# Altium PCB Skeecb.PcbDoc
Units mm, origin at the board's own origin, x right, y up, seen from the top; angles counter-clockwise.
Board outline 102 x 102 mm, 2 copper layers (Top Layer, Bottom Layer); 46 components, 37 nets, 162 pads, 6 vias.
Unrouted connection lines stored in the file: 42.
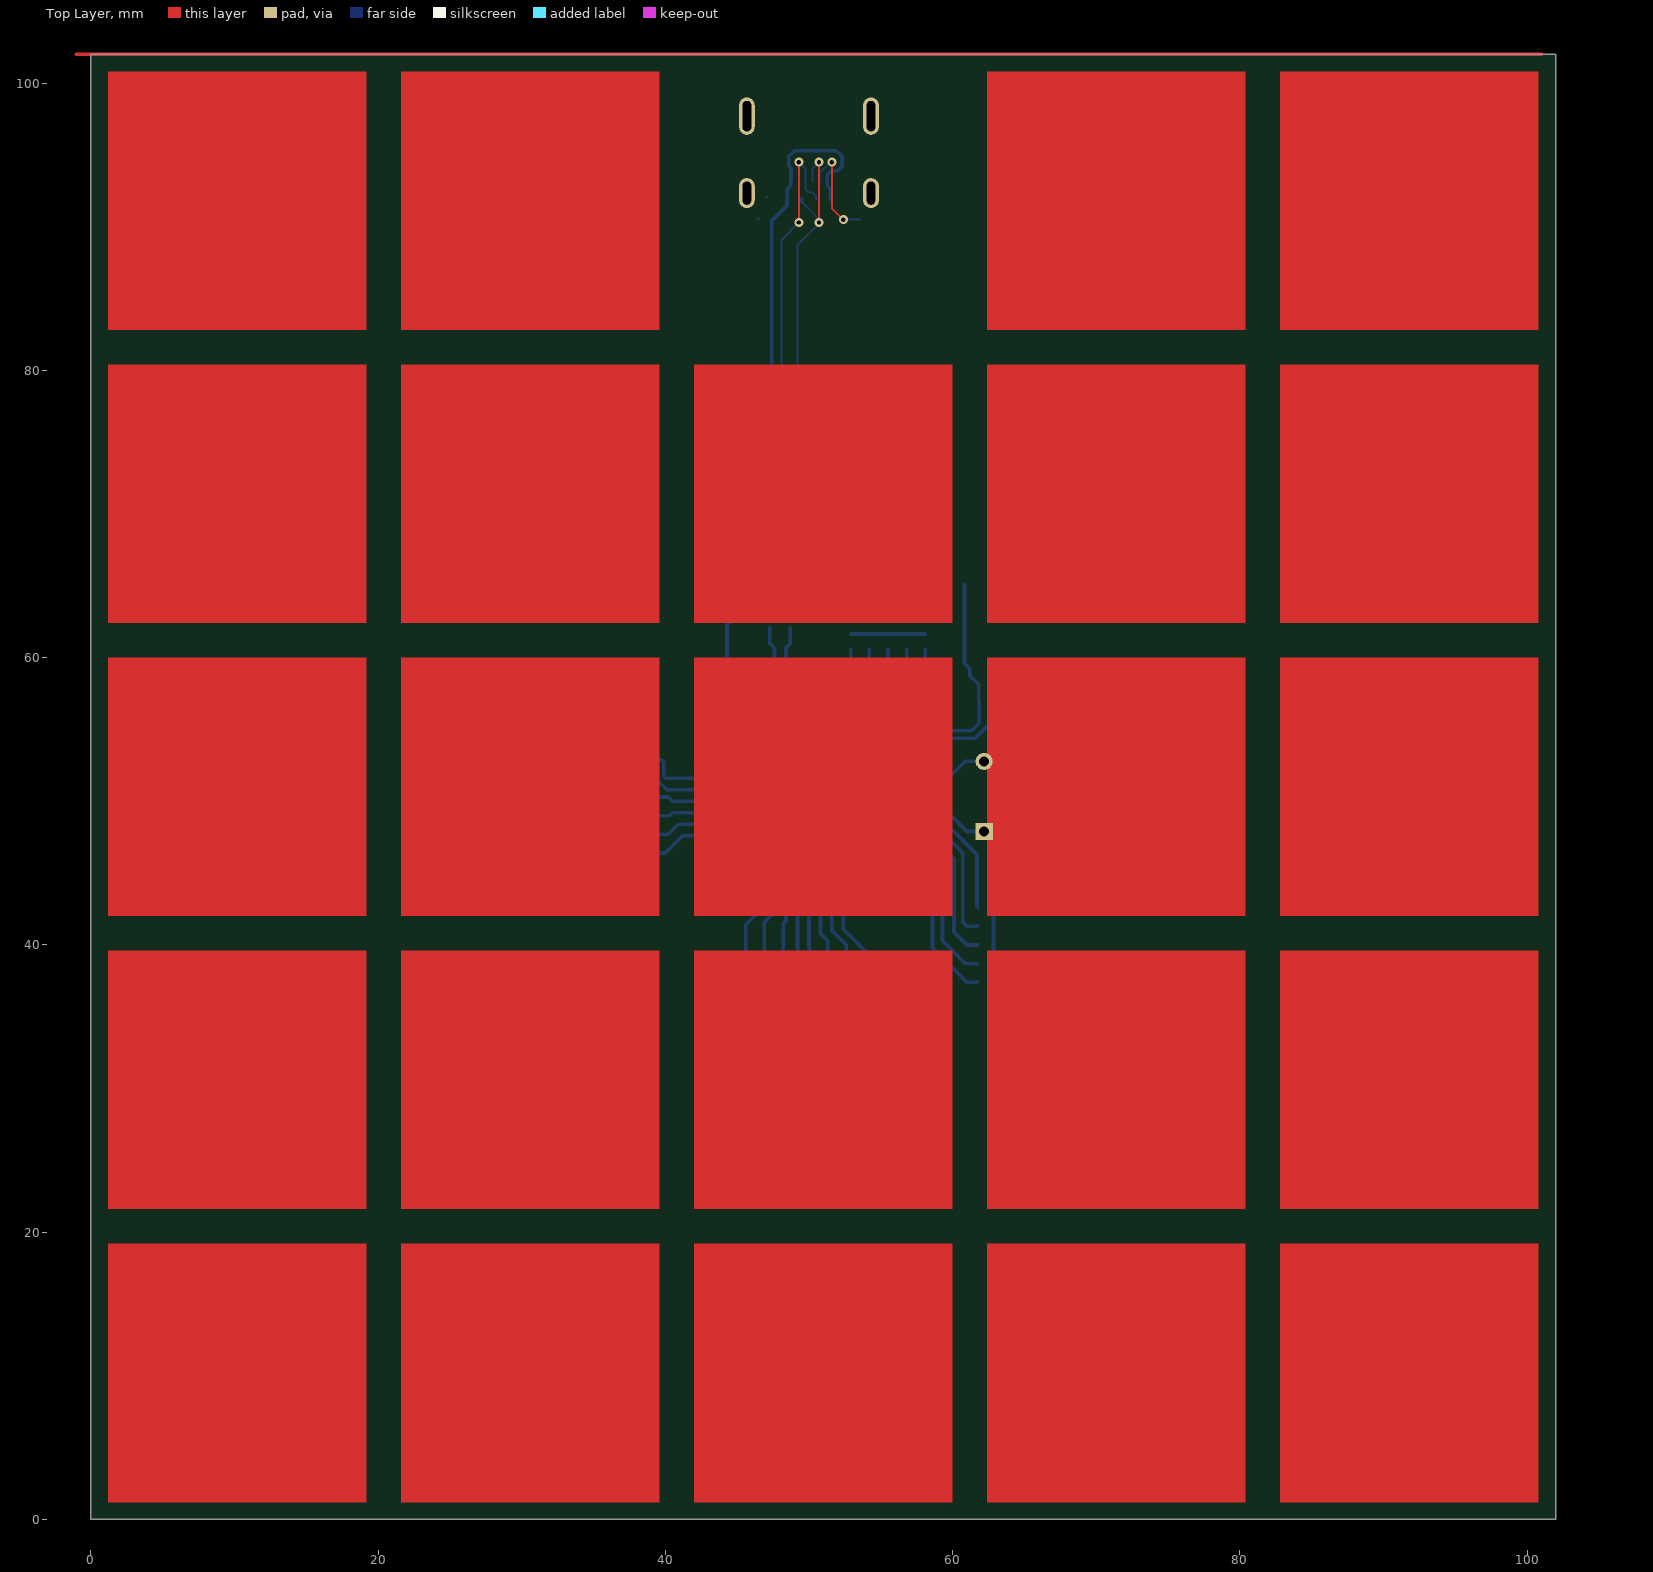
[diagram p0: Top Layer view]
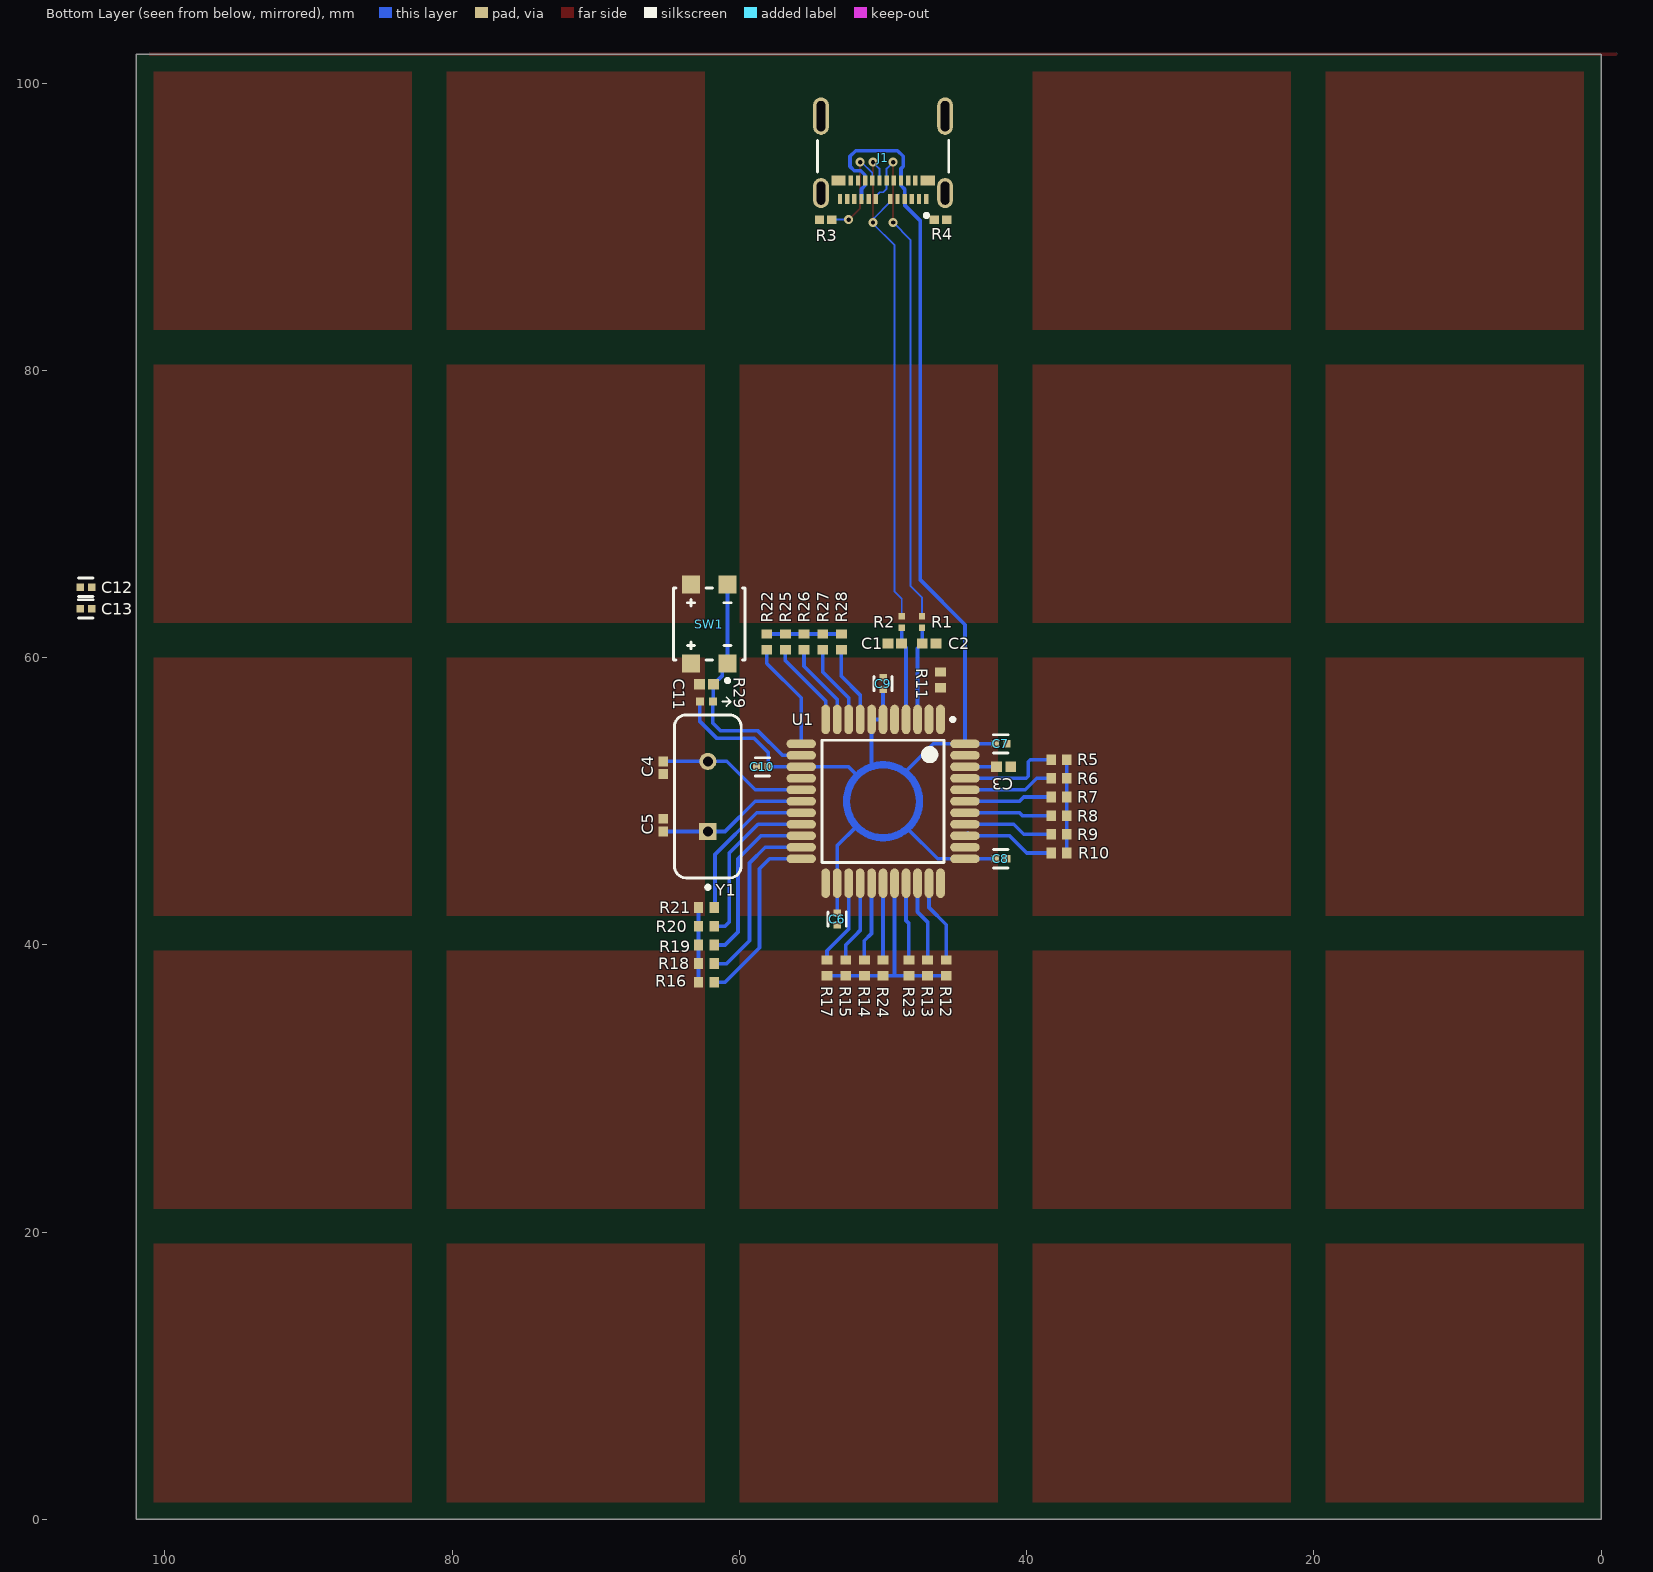
[diagram p1: Bottom Layer view, seen from below]

## Layer stack, top to bottom
Top Solder: solder mask 0.0102, Solder Resist, Dk 3.5
Top Layer: signal copper 0.0356
Dielectric 1: dielectric 0.32, FR-4, Dk 4.8
Bottom Layer: signal copper 0.0356
Bottom Solder: solder mask 0.0102, Solder Resist, Dk 3.5

## Board outline
0,0 0,102 102,102 102,0

## Design rules (kind name [scope] priority, off if disabled: settings)
Clearance [All] p1: gap=0.127 ignorepadtopadclearanceinfootprint=TRUE except(0: Arc-Hole Track-Hole SMDPad-Hole THPad-Hole Via-Hole Fill-Hole Poly-Hole Region-Hole Text-Hole; 0.254: SMDPad-SMDPad)
PolygonConnect [All] p1: connectstyle=Relief reliefconductorwidth=0.254 reliefentries=4 polygonreliefangle="90 Angle" airgapwidth=0.254
RoutingVias [All] p1: holewidth=0.711 width=1.27 viastyle="Through Hole" minholewidth=0.711 minwidth=1.27 maxholewidth=0.711 maxwidth=1.27
SolderMaskExpansion [All] p1: expansion=0.102 istentingtop=FALSE
Width Width_1 [All] p1: maxlimit=1.27 minlimit=0.127 preferedwidth=0.254 minimp=50.000000 maximp=50.000000 favimp=50.000000
30 further rules are at their usual default settings.

## Classes and differential pairs
component class Skematic: C1 C2 C3 C4 C5 C7 C8 C9 C10 C11 C12 C13 J1 R1 R2 R3 R4 R5 R6 R7 R8 R9 R10 R11 R12 R13 R14 R15 R16 R17 R18 R19 R20 R21 R22 R23 R24 R25 R26 R27 R28 R29 U1

## Components (designator, comment, footprint, x,y, rotation, side; value= is the part's Value field where it differs from the comment)
C1 "47pF" CAPC1005X55X30ML05T10 49.19,60.99 r180 bottom
C2 "47pF" CAPC1005X55X30ML05T10 46.79,60.99 r180 bottom
C3 "100nF" CAPC1050X55X23ML05T13 41.6,52.4 r0 bottom
C4 "22pF" CAPC1005X56X25NL10T15 65.3,52.34 r90 bottom
C5 "22pF" CAPC1005X56X25NL10T15 65.3,48.34 r270 bottom
C6 "100nF" FP-C0402-BB-MFG 53.2,41.8 r270 bottom value="0.10 μF"
C7 "100nF" FP-C0402-BB-MFG 41.8,54 r180 bottom value="0.10 μF"
C8 "100nF" FP-C0402-BB-MFG 41.8,46 r180 bottom value="0.10 μF"
C9 "100nF" FP-C0402-BB-MFG 50,58.2 r90 bottom value="0.10 μF"
C10 "100nF" FP-C0402-BB-MFG 58.4,52.4 r0 bottom value="0.10 μF"
C11 "100nF" CAPC1050X55X23ML05T13 62.3,58.14 r0 bottom
C12 "100nF" FP-C0402-BB-MFG 105.5,64.9 r180 bottom value="0.10 μF"
C13 "100nF" FP-C0402-BB-MFG 105.5,63.4 r180 bottom value="0.10 μF"
J1 "1054500101" FP-1054500101-MFG 50,95.7 r0 bottom locked
R1 "22R" RESC1005X40X25LL05T05 47.29,62.49 r90 bottom
R2 "22R" RESC1005X40X25LL05T05 48.69,62.49 r90 bottom
R3 "5.1K" RESC1005X40X25NL10T10 54,90.5 r0 bottom
R4 "5.1K" RESC1005X40X25NL10T10 46,90.5 r180 bottom
R5 "1M" RESC0402(1005)_M 37.75,52.9 r180 bottom value="1000000.00 Ohm"
R6 "1M" RESC0402(1005)_M 37.75,51.6 r180 bottom value="1000000.00 Ohm"
R7 "1M" RESC0402(1005)_M 37.75,50.3 r180 bottom value="1000000.00 Ohm"
R8 "1M" RESC0402(1005)_M 37.75,49 r180 bottom value="1000000.00 Ohm"
R9 "1M" RESC0402(1005)_M 37.75,47.7 r180 bottom value="1000000.00 Ohm"
R10 "1M" RESC0402(1005)_M 37.75,46.4 r180 bottom value="1000000.00 Ohm"
R11 "1M" RESC0402(1005)_M 46,58.45 r90 bottom value="1000000.00 Ohm"
R12 "1M" RESC0402(1005)_M 45.6,38.4 r270 bottom value="1000000.00 Ohm"
R13 "1M" RESC0402(1005)_M 46.9,38.4 r270 bottom value="1000000.00 Ohm"
R14 "1M" RESC0402(1005)_M 51.3,38.4 r270 bottom value="1000000.00 Ohm"
R15 "1M" RESC0402(1005)_M 52.6,38.4 r270 bottom value="1000000.00 Ohm"
R16 "1M" RESC0402(1005)_M 62.3,37.4 r0 bottom value="1000000.00 Ohm"
R17 "1M" RESC0402(1005)_M 53.9,38.4 r270 bottom value="1000000.00 Ohm"
R18 "1M" RESC0402(1005)_M 62.3,38.7 r0 bottom value="1000000.00 Ohm"
R19 "1M" RESC0402(1005)_M 62.3,40 r0 bottom value="1000000.00 Ohm"
R20 "1M" RESC0402(1005)_M 62.3,41.3 r0 bottom value="1000000.00 Ohm"
R21 "1M" RESC0402(1005)_M 62.3,42.6 r0 bottom value="1000000.00 Ohm"
R22 "1M" RESC0402(1005)_M 58.1,61.1 r90 bottom value="1000000.00 Ohm"
R23 "1M" RESC0402(1005)_M 48.2,38.4 r270 bottom value="1000000.00 Ohm"
R24 "1M" RESC0402(1005)_M 50,38.4 r270 bottom value="1000000.00 Ohm"
R25 "1M" RESC0402(1005)_M 56.8,61.1 r90 bottom value="1000000.00 Ohm"
R26 "1M" RESC0402(1005)_M 55.5,61.1 r90 bottom value="1000000.00 Ohm"
R27 "1M" RESC0402(1005)_M 54.2,61.1 r90 bottom value="1000000.00 Ohm"
R28 "1M" RESC0402(1005)_M 52.9,61.1 r90 bottom value="1000000.00 Ohm"
R29 "10K" RESC1005X40X25NL05T05 62.3,56.94 r180 bottom
SW1 "7914G-1-000E" BOUR-7914G-1-000E_V 62.1,62.34 r0 bottom
U1 "ATmega32U4-AU" 44ML_M 50,50 r270 bottom locked
Y1 "16Mhz" FOX-FOXSLF160-20 62.2,50.34 r90 bottom

## Footprints (in the part's own frame and the unit in brackets; to place one, negate y for a bottom-side part, rotate by r counter-clockwise, add the part's x,y. Pads: shape width x height; smd on the part's side, far side on the other; paste and mask are expansions set on the pad)
44ML_M [mm] "Thin QFP, 44-Leads, Body 10x10mm, Pitch 0.8mm, IPC Low Density"
  oval 2.05x0.6 smd: 1(-5.7,4) 2(-5.7,3.2) 3(-5.7,2.4) 4(-5.7,1.6) 5(-5.7,0.8) 6(-5.7,0) 7(-5.7,-0.8) 8(-5.7,-1.6) 9(-5.7,-2.4) 10(-5.7,-3.2) 11(-5.7,-4) 23(5.7,-4) 24(5.7,-3.2) 25(5.7,-2.4) 26(5.7,-1.6) 27(5.7,-0.8) 28(5.7,0) 29(5.7,0.8) 30(5.7,1.6) 31(5.7,2.4) 32(5.7,3.2) 33(5.7,4)
  oval 0.6x2.05 smd: 12(-4,-5.7) 13(-3.2,-5.7) 14(-2.4,-5.7) 15(-1.6,-5.7) 16(-0.8,-5.7) 17(0,-5.7) 18(0.8,-5.7) 19(1.6,-5.7) 20(2.4,-5.7) 21(3.2,-5.7) 22(4,-5.7) 34(4,5.7) 35(3.2,5.7) 36(2.4,5.7) 37(1.6,5.7) 38(0.8,5.7) 39(0,5.7) 40(-0.8,5.7) 41(-1.6,5.7) 42(-2.4,5.7) 43(-3.2,5.7) 44(-4,5.7)
  silkscreen extent -5.82,-4.25 4.25,4.97, body extent -5,-5 5,5, height 1.2
BOUR-7914G-1-000E_V [mm] "SMD, 4-Leads, Body 5x5mm, Height 4.49mm"
  rect 1.27x1.27 smd: 1(-1.27,2.75) 2(1.27,2.75) 3(1.27,-2.75) 4(-1.27,-2.75)
  silkscreen extent -2.5,-2.5 2.5,4.06, body extent -2.5,-3.1 2.5,3.1, height 4.11
CAPC1005X55X30ML05T10 [mm] "Chip Capacitor, 2-Leads, Body 1.00x0.50mm, IPC Low Density"
  rect 0.76x0.72 smd: 1(-0.48,0) 2(0.48,0)
  body extent -0.53,-0.28 0.53,0.27, height 0.55
CAPC1005X56X25NL10T15 [mm] "Chip Capacitor, 2-Leads, Body 1.00x0.50mm, IPC Medium Density"
  rect 0.68x0.64 smd: 1(-0.44,0) 2(0.44,0)
  body extent -0.55,-0.3 0.55,0.3, height 0.56
CAPC1050X55X23ML05T13 [mm] "Chip Capacitor, 2-Leads, Body 1.05x0.55mm, IPC Low Density"
  rect 0.76x0.72 smd: 1(-0.49,0) 2(0.49,0)
  body extent -0.53,-0.28 0.53,0.27, height 0.55
FOX-FOXSLF160-20 [mm] "THD, 2-Leads, Body 11.35x4.65mm"
  rect 1.2x1.2 hole 0.7: 1(-2.44,0)
  round 1.2 hole 0.7: 2(2.44,0)
  silkscreen extent -6.45,-2.32 5.68,2.32, body extent -5.67,-2.32 5.68,2.33, height 3.6
FP-1054500101-MFG [mm]
  rrect100% 1.1x2.1 hole 1.6 slot 0.6 at 0 deg paste-1000 mask+0: 1(-4.32,3.36) 2(4.32,3.36)
  rrect100% 1.1x2.6 hole 2.1 slot 0.6 at 0 deg paste-1000 mask+0: 3(-4.32,-2) 4(4.32,-2)
  rect 0.3x0.7 smd paste+0 mask+0: A1(-3,3.77) A2(-2.5,3.77) A3(-2,3.77) A4(-1.5,3.77) A5(-1,3.77) A6(-0.5,3.77) A7(0.5,3.77) A8(1,3.77) A9(1.5,3.77) A10(2,3.77) A11(2.5,3.77) A12(3,3.77) B2(2.25,2.47) B3(1.75,2.47) B4(1.25,2.47) B5(0.75,2.47) B6(0.25,2.47) B7(-0.25,2.47) B8(-0.75,2.47) B9(-1.25,2.47) B10(-1.75,2.47) B11(-2.25,2.47)
  rect 1x0.7 smd paste+0 mask+0: B1(3.1,2.47) B12(-3.1,2.47)
  silkscreen extent -4.57,-0.3 4.57,5.03
FP-C0402-BB-MFG [mm]
  rect 0.52x0.52 smd paste+0 mask+0: 1(-0.4,0) 2(0.4,0)
  silkscreen extent -0.5,-0.64 0.5,0.64, body extent -0.5,-0.25 0.5,0.25, height 0.55
RESC0402(1005)_M [mm] "Chip Resistor, Body 1.0x0.5mm, IPC Low Density"
  rect 0.65x0.75 smd: 1(-0.55,0) 2(0.55,0)
  body extent -0.52,-0.28 0.53,0.28, height 0.4
RESC1005X40X25LL05T05 [mm] "Chip Resistor, 2-Leads, Body 1.00x0.50mm, IPC High Density"
  rect 0.45x0.45 smd: 1(-0.4,0) 2(0.4,0)
  body extent -0.53,-0.27 0.53,0.28, height 0.4
RESC1005X40X25NL05T05 [mm] "Chip Resistor, 2-Leads, Body 1.00x0.50mm, IPC Medium Density"
  rect 0.55x0.55 smd: 1(-0.45,0) 2(0.45,0)
  body extent -0.53,-0.27 0.53,0.28, height 0.4
RESC1005X40X25NL10T10 [mm] "Chip Resistor, 2-Leads, Body 1.00x0.50mm, IPC Medium Density"
  rect 0.65x0.6 smd: 1(-0.425,0) 2(0.425,0)
  body extent -0.55,-0.3 0.55,0.3, height 0.4

## Part data
C1 C2: library part CMP-2008-03283-1, Manufacturer=Kemet, Part Number=C0402C470J5GACTU
C3 C11: library part CMP-2000-05439-1, "Chip Capacitor, 100 nF, +/- 10%, 16 V, -55 to 125 degC, 0402 (1005 Metric), RoHS, Tape and Reel", Capacitance=100000pF, Case Size/Dimension=0402, Dielectric=X7R, Manufacturer="Samsung Electro-Mechanics", Rated Voltage=16V, Tolerance (%)=±10%, Datasheet URL=https://datasheet.ciiva.com/29198/458718-da-01-en-vs-kondensator-0402-29198423.pdf, Datasheet Version=Nov-10, Manufacturer URL=http://www.samsungsem.com/global/index.jsp
C4 C5: library part CMP-2008-02613-1, Manufacturer="AVX Interconnect / Elco", Part Number=04025A220JAT2A
C6 C7 C8 C9 C10 C12 C13: library part CMP-03020-023811-1, "CAP CER 0.1UF 10V X5R 0402", Capacitance="0.10 μF", Manufacturer=Kemet, Manufacturer Part Number=C0402C104K8PACTU, Package=C0402-BB, Temperature="-55°C to +125°C", Temperature Characteristic=X5R, Temperature Coefficient=15%, Temperature Range High=+125°C, Temperature Range Low=-55°C, Tolerance=0.1, Voltage Rating="10 V", Automotive=No, Category=Cap, ComponentLink2Description=Datasheet, ComponentLink2URL=https://content.kemet.com/datasheets/KEM_C1002_X7R_SMD.pdf, Device Class L1="Passive Components", Device Class L2=Capacitors, Device Class L3="Ceramic Capacitors", Digikey Description="CAP CER 0.1UF 10V X5R 0402", Height=0.55mm, Ipc Land Pattern Name=CAPC10050X50, Lead Free=Yes, Material=Ceramic, Mouser Description="Capacitor 100 nF 10 VDC 0402", Octopart=https://octopart.com/c0402c104k8pactu-kemet-140039, RoHS=TRUE
J1: library part CMP-04767-000004-1, "CONN RCP USB3.1 TYPEC 24P SMD RA", Current Rating=0.25/1.25/5A, Manufacturer=Molex, Package=0, Temperature="-30°C to +85°C", Temperature Range High=+85°C, Temperature Range Low=-30°C, Voltage Rating=30V, Automotive=No, Category=Conn, ComponentLink2Description=Datasheet, ComponentLink2URL=https://www.molex.com/webdocs/datasheets/pdf/en-us/1054500101_IO_CONNECTORS.pdf, Conn Orientation="Right Angle", Contact Material=Gold,Nickel, Device Class L1=Connectors, Device Class L2="USB Connectors", Device Class L3=unset, Digikey Description="CONN RCP USB3.1 TYPEC 24P SMD RA", Footprint Url=https://www.molex.com/pdm_docs/sd/1054500101_sd.pdf, Height=3.44mm, Is Female=yes, Lead Free=Yes, Manufacturer Part Number=1054500101, Mouser Description="USB Shielded I/O Receptacle; Type C; Right Angle; Surface Mount; Gold over Nickel", Number Of Contacts=24, Octopart=https://octopart.com/105450-0101-molex-68082325, Pitch=0.5mm, RoHS=TRUE, Shielding=true, Usb Standard="USB 3.1"
R1 R2: library part CMP-2002-08382-1, Manufacturer="Vishay Dale", Part Number=CRCW040222R0FKED
R3 R4: library part CMP-2002-05812-1, Manufacturer=Panasonic, Part Number=ERA-2AEB512X
R5 R6 R7 R8 R9 R10 R11 R12 R13 R14 R15 R16 R17 R18 R19 R20 R21 R22 R23 R24 R25 R26 R27 R28: library part CMP-1011-00849-1, "1M 0.063W 1% 0402 (1005 Metric)  SMD", Case-EIA=0402, Case-Metric=1005, Power="0.063 W", Tolerance="1 %", Technology=SMT
R29: library part CMP-2002-01183-1, Manufacturer=Panasonic, Part Number=ERT-J0ER103J
SW1: library part CMP-2000-05692-1, "SPST Gull Wing Sealed Key Switch, 100 mA, 16 V, -55 to 125 degC, 4-Pin SMD, RoHS, Tape and Reel", Actuator Color=N/A, Contact Rating @ Voltage=0.1A, Dielectric Strength=250VAC, Manufacturer=Bourns, Maximum AC Voltage Rating=16V, Maximum Contact Resistance=100mOhm, Minimum Insulation Resistance=100MOhm, Operating Force=2.94N, Operating Temperature=-55to125C, Package Description="4-Pin Surface Mount Device, Body 5 x 5 mm, Height 4.49 mm", Actuator Length=1.65mm, Actuator Style=RoundButton, Base Material=Thermoplastic, Body Orientation=Straight, Contact Material=Gold, Contact Plating=N/A, COO=TW, Datasheet URL=http://www.bourns.com/docs/Product-Datasheets/7914.pdf, Datasheet Version=08/2016, Dimension=5x6.2x4.19mm, ECCN=EAR99, Electrical Life=N/A, Family=7914, Ground Terminal=No, Housing Material=N/A, HTS=8536509065, Illumination Type=N/R, Manufacturer URL=http://www.bourns.com/, Maximum DC Voltage Rating=16V, Mechanical Life=100000Cycles, Mounting=SurfaceMount,GullWing, Mounting Technology=SurfaceMount, Package Reference=7914G-1-000E, Packaging=EmbossedTapeandReel, Part No=7914G-1-000E, Pole Throw Configuration=SPST, Product Weight=N/A, RoHS=Yes, Seal Description=N/A, Seal Location=N/A, Supplier=Bourns, Switch Configuration=N.O., Type=KeySwitch
U1: library part CMP-0095-00285-2, "8-bit AVR Microcontroller, 2.7-5.5V, 16MHz, 32KB Flash, 1KB EEPROM, 2.5KB SRAM, USB Controller, 44-pin TQFP, Industrial Grade (-40°C to 85°C), Ext Osc", ComponentLink1Description="Manufacturer URL", ComponentLink1URL=http://www.atmel.com/, ComponentLink2Description="ATmega16U4/32U4 Datasheet", ComponentLink2URL=http://www.atmel.com/dyn/resources/prod_documents/doc7766.pdf, ComponentLink3Description="ATmega16U4 ATmega32U4 Summary", ComponentLink3URL=http://www.atmel.com/dyn/resources/prod_documents/7766S.pdf, DatasheetVersion="revF, Nov-2010", PackageDescription="44-Pin Plastic Thin Quad Flat Pack, 10 x 10 x 1.0 mm Body, 0.8 mm Pitch (TQFP)", PackageReference=44ML, PackageVersion="rev.G, Jul-2007", RevisionNote="DatasheetVersion updated. URLs added."
Y1: library part CMP-1749-00003-1, "Resistance Weld Thru-Hole Crystal, 16 MHz, -20 to 70 degC, 2-Pin THD, RoHS, Bulk", Case\Package=Axial, Max Operating Temperature="155 degC", Min Operating Temperature="-55 degC", Package Quantity=200, Power Rating="250 mW", Resistance="221 kohm", Tolerance=1%, Voltage Rating="250 V", ComponentLink1Description="Manufacturer URL", ComponentLink1URL=http://www.foxonline.com/, ComponentLink2Description=Datasheet, ComponentLink2URL=http://www.foxonline.com/pdfs/hc49slf.pdf, DatasheetVersion=Mar-15, Length="0.248 inch", Mount="Through Hole", PackageDescription="2-Pin Through Hole Device, Body 11.35 x 4.65 mm", PackageReference=FOXSLF160-20, Packaging=Bulk, RoHSCompliant=true

## Via types
v1: diameter 0.61, hole 0.305, Top Layer to Bottom Layer, 6 vias

## Nets (pads, with @x,y where several pads share a name; then routed paths per layer and width w, separated by ;. In a path a pad name is that pad's centre, name@x,y a point inside that pad or via, vN(x,y) a via of type N, cw(c..) or ccw(c..) an arc to the next point about the centre after c; other vN are vias at no path point)
+5: C6.1 C7.1 C8.1 C9.1 C10.1 C12.1 C13.1 J1.A4 J1.A9 J1.B4 J1.B9 R29.1 U1.2 U1.6 U1.7 U1.14 U1.24 U1.34 U1.44 | length 108.2
  Bottom Layer w0.254: C7.1 U1.44 ; C8.1@42.23,45.97 C8.1 U1.34 46.199,46 48.306,48.107 ; 46,92.03 46.023,92.053 ; 48.476,52.032 46.508,54 U1.44 ; C9.1@49.878,57.922 C9.1 U1.6 U1.7 50.8,52.527 50.711,52.438 ; J1.A9 51.5,92.621 51.273,92.848 51.273,93.207 J1.B4 51.273,93.253 51.273,93.612 51.561,93.9 52,93.9 52.3,94.2 52.3,94.9 51.9,95.3 49,95.3 48.6,94.9 48.6,94.2 48.75,94.05 J1.B9 48.727,93.207 48.727,92.848 48.5,92.621 J1.A4 48.477,91.907 48.477,91.477 47.4,90.4 47.4,65.4 44.3,62.3 U1.44 ; 51.796,51.796 52.4,52.4 U1.14 C10.1 58,53.4 59,54.4 61.6,54.4 62.75,55.55 R29.1 ; 51.844,48.253 53.2,46.897 U1.24 C6.1
  Bottom Layer w0.508: 52.54,50 ccw(c50,50) 52.54,50
GND: C1.1 C2.2 C3.1 C4.1 C5.1 C6.2 C7.2 C8.2 C9.2 C10.2 C11.2 C12.2 C13.2 J1.1 J1.2 J1.3 J1.4 J1.A1 J1.A12 J1.B1 J1.B12 R3.2 R4.2 SW1.2 SW1.3 U1.5 U1.15 U1.23 U1.33 U1.35 U1.43
NetC1_2: C1.2 R2.1 U1.4 | length 6.5
  Bottom Layer w0.254: U1.4 48.4,60.7 48.69,60.99 C1.2 ; R2.1 48.7,62.08 C1.2@48.7,61
NetC2_1: C2.1 R1.1 U1.3 | length 6.5
  Bottom Layer w0.254: R1.1 47.28,62.08 47.28,61 C2.1 47.29,60.99 47.523,60.757 47.523,60.737 47.6,60.66 U1.3
NetC3_2: C3.2 U1.42 | length 2.2
  Bottom Layer w0.254: C3.2 U1.42
NetC4_2: C4.2 U1.16 Y1.2 | length 10.4
  Bottom Layer w0.254: U1.16 58.9,50.8 60.88,52.78 Y1.2 C4.2
NetC5_2: C5.2 U1.17 Y1.1 | length 10.5
  Bottom Layer w0.254: U1.17 58.9,50 61,47.9 Y1.1 C5.2
NetC11_1: C11.1 R29.2 SW1.1 SW1.4 U1.13 | length 17.2
  Bottom Layer w0.254: U1.13 57,53.2 58.7,54.9 61.3,54.9 61.85,55.45 R29.2 61.83,56.96 61.83,58.12 C11.1 61.79,58.14 61.207,58.723 61.207,59.213 SW1.1 SW1.4
NetJ1_A5: J1.A5 R4.1 | length 0.1
  Bottom Layer w0.127: R4.1 R4.1@46.525,90.6
NetJ1_A6: J1.A6 J1.B6 R2.2 | length 36.2
  Top Layer w0.127: v1(50.7,90.3) v1(50.7,94.5)
  Bottom Layer w0.127: 47,92.03 47,92.031 47.086,92.118 ; R2.2 48.7,62.9 48.7,64.1 49.2,64.6 49.2,88.7 50.7,90.2 v1(50.7,90.3) ; J1.A6@49.5,91.73 50.632,90.598 v1@50.632,90.368 ; J1.A6 J1.A6@49.53,91.9 ; J1.B6 50.25,94.05 v1(50.7,94.5)
  Bottom Layer w0.254: J1.A6@49.5,91.73 J1.A6 ; v1@50.632,90.368 v1(50.7,90.3)
NetJ1_A7: J1.A7 J1.B7 R1.2 | length 35.6
  Top Layer w0.127: v1(49.3,90.3) v1(49.3,94.5)
  Bottom Layer w0.127: R1.2 47.3,62.9 47.3,64.2 48.1,65 48.1,89.1 v1(49.3,90.3) ; v1(49.3,94.5) 49.75,94.05 J1.B7 49.75,92.65 50,92.4 50.23,92.4 50.5,92.13 J1.A7
NetJ1_B5: J1.B5 R3.1 | length 7.2
  Top Layer w0.127: v1(51.6,94.5) 51.6,91.3 v1(52.4,90.5)
  Bottom Layer w0.127: J1.B5 50.75,93.75 51.5,94.5 v1(51.6,94.5) ; v1(52.4,90.5) R3.1
NetR5_1: R5.1 U1.41 | length 7.1
  Bottom Layer w0.254: R5.1 39.751,52.9 39.9,52.751 39.9,51.749 40.049,51.6 U1.41
NetR5_2: R5.2 R6.2 R7.2 R8.2 R9.2 R10.2 R11.2 R12.2 R13.2 R14.2 R15.2 R16.2 R17.2 R18.2 R19.2 R20.2 R21.2 R22.2 R23.2 R24.2 R25.2 R26.2 R27.2 R28.2 U1.29 | length 31.6
  Bottom Layer w0.254: R10.2 R9.2 R8.2 R7.2 R6.2 R5.2 ; R12.2 R13.2 R23.2 49.2,37.85 ; U1.29 49.2,37.85 ; R28.2 R27.2 R26.2 R25.2 R22.2 ; R17.2 R15.2 R14.2 R24.2 49.2,37.85 ; R16.2 R18.2 R19.2 R20.2 R21.2
NetR6_1: R6.1 U1.40 | length 6.3
  Bottom Layer w0.254: R6.1 39.3,51.6 40.1,50.8 U1.40
NetR7_1: R7.1 U1.39 | length 6.1
  Bottom Layer w0.254: R7.1 40.2,50.3 40.5,50 U1.39
NetR8_1: R8.1 U1.38 | length 6.1
  Bottom Layer w0.254: R8.1 40.3,49 40.5,49.2 U1.38
NetR9_1: R9.1 U1.37 | length 6.3
  Bottom Layer w0.254: R9.1 40.2,47.7 40.9,48.4 U1.37
NetR10_1: R10.1 U1.36 | length 6
  Bottom Layer w0.254: R10.1 40,46.4 41.2,47.6 U1.36@43.776,47.6
NetR11_1: R11.1 U1.1
NetR12_1: R12.1 U1.32 | length 5.8
  Bottom Layer w0.254: R12.1 45.6,41.4 46.8,42.6 U1.32
NetR13_1: R13.1 U1.31 | length 5.6
  Bottom Layer w0.254: R13.1 46.9,41.6 47.6,42.3 U1.31
NetR14_1: R14.1 U1.27 | length 5.6
  Bottom Layer w0.254: U1.27 50.8,40.8 51.3,40.3 R14.1
NetR15_1: R15.1 U1.26 | length 5.8
  Bottom Layer w0.254: U1.26 51.6,41 51.9,40.7 52.6,40 R15.1
NetR16_1: R16.1 U1.22 | length 12.8
  Bottom Layer w0.254: U1.22 57.9,46 58.6,45.3 58.6,39.8 61,37.4 R16.1
NetR17_1: R17.1 U1.25 | length 6
  Bottom Layer w0.254: U1.25 52.4,41.1 53.9,39.6 R17.1
NetR18_1: R18.1 U1.21 | length 12.6
  Bottom Layer w0.254: U1.21 58.2,46.8 59.3,45.7 59.3,40.3 60.9,38.7 R18.1
NetR19_1: R19.1 U1.20 | length 12.2
  Bottom Layer w0.254: U1.20 58.5,47.6 60.1,46 60.1,40.9 61,40 R19.1
NetR20_1: R20.1 U1.19 | length 11.8
  Bottom Layer w0.254: U1.19 58.7,48.4 60.7,46.4 60.7,41.6 61,41.3 R20.1
NetR21_1: R21.1 U1.18 | length 10.9
  Bottom Layer w0.254: U1.18 58.8,49.2 61.7,46.3 61.7,42.65 R21.1
NetR22_1: R22.1 U1.12 | length 7.5
  Bottom Layer w0.254: U1.12 55.7,57.2 58.1,59.6 R22.1
NetR23_1: R23.1 U1.30 | length 5.4
  Bottom Layer w0.254: R23.1 48.2,41.5 48.4,41.7 U1.30
NetR24_1: R24.1 U1.28 | length 5.4
  Bottom Layer w0.254: R24.1 U1.28
NetR25_1: R25.1 U1.11 | length 6
  Bottom Layer w0.254: U1.11 54,57 56.8,59.8 R25.1
NetR26_1: R26.1 U1.10 | length 5.8
  Bottom Layer w0.254: U1.10 53.2,57.1 55.5,59.4 R26.1
NetR27_1: R27.1 U1.9 | length 5.6
  Bottom Layer w0.254: U1.9 52.4,57.2 54.2,59 R27.1
NetR28_1: R28.1 U1.8 | length 5.4
  Bottom Layer w0.254: U1.8 51.6,57.4 52.9,58.7 R28.1
pads on no net: J1.A2 J1.A3 J1.A8 J1.A10 J1.A11 J1.B2 J1.B3 J1.B8 J1.B10 J1.B11
copper on no net: | length 102
  Top Layer w0.254: -1,102 101,102

## Other copper
Top Layer:
  rectangle: 82.8,1.2 100.8,19.2
  rectangle: 82.8,21.6 100.8,39.6
  rectangle: 82.8,42 100.8,60
  rectangle: 82.8,62.4 100.8,80.4
  rectangle: 82.8,82.8 100.8,100.8
  rectangle: 1.2,82.8 19.2,100.8
  rectangle: 1.2,62.4 19.2,80.4
  rectangle: 1.2,42 19.2,60
  rectangle: 1.2,21.6 19.2,39.6
  rectangle: 1.2,1.2 19.2,19.2
  rectangle: 21.6,1.2 39.6,19.2
  rectangle: 21.6,21.6 39.6,39.6
  rectangle: 21.6,42 39.6,60
  rectangle: 21.6,62.4 39.6,80.4
  rectangle: 21.6,82.8 39.6,100.8
  rectangle: 42,62.4 60,80.4
  rectangle: 42,42 60,60
  rectangle net NetC5_2: 42,21.6 60,39.6
  rectangle: 42,1.2 60,19.2
  rectangle: 62.4,1.2 80.4,19.2
  rectangle: 62.4,21.6 80.4,39.6
  rectangle: 62.4,42 80.4,60
  rectangle: 62.4,62.4 80.4,80.4
  rectangle: 62.4,82.8 80.4,100.8

## Silkscreen, mask and mechanical layers (free items; w line width, h text height)
Bottom Overlay:
  lines w0.127: 60.9,56.64 60.6,56.94 ; 60.9,57.24 60.6,56.94 ; 61.2,56.94 60.6,56.94